# EAGLE board MPL3115A2_breakout-Panel-v11b (EAGLE 7.5.0), part 1 of 2
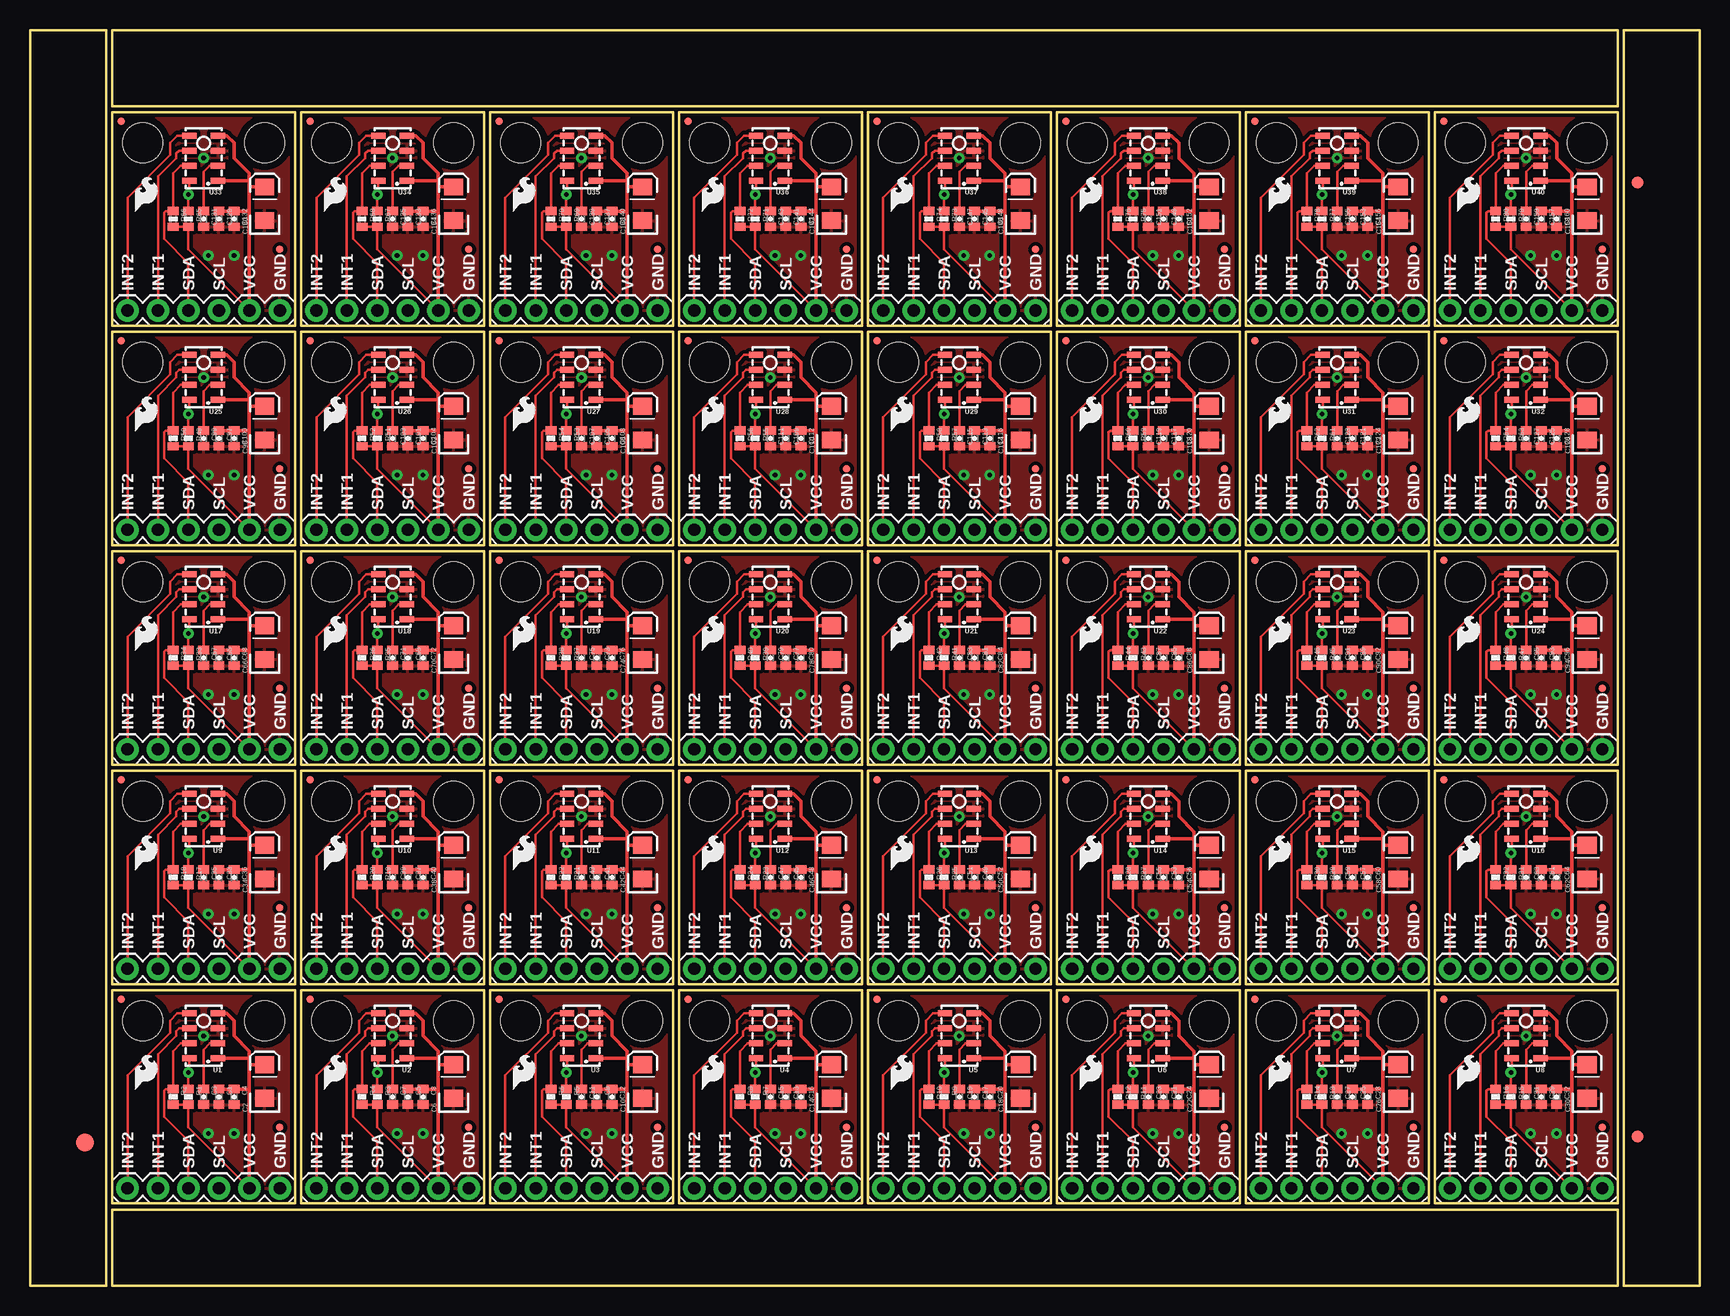
[diagram p0: board, top side]
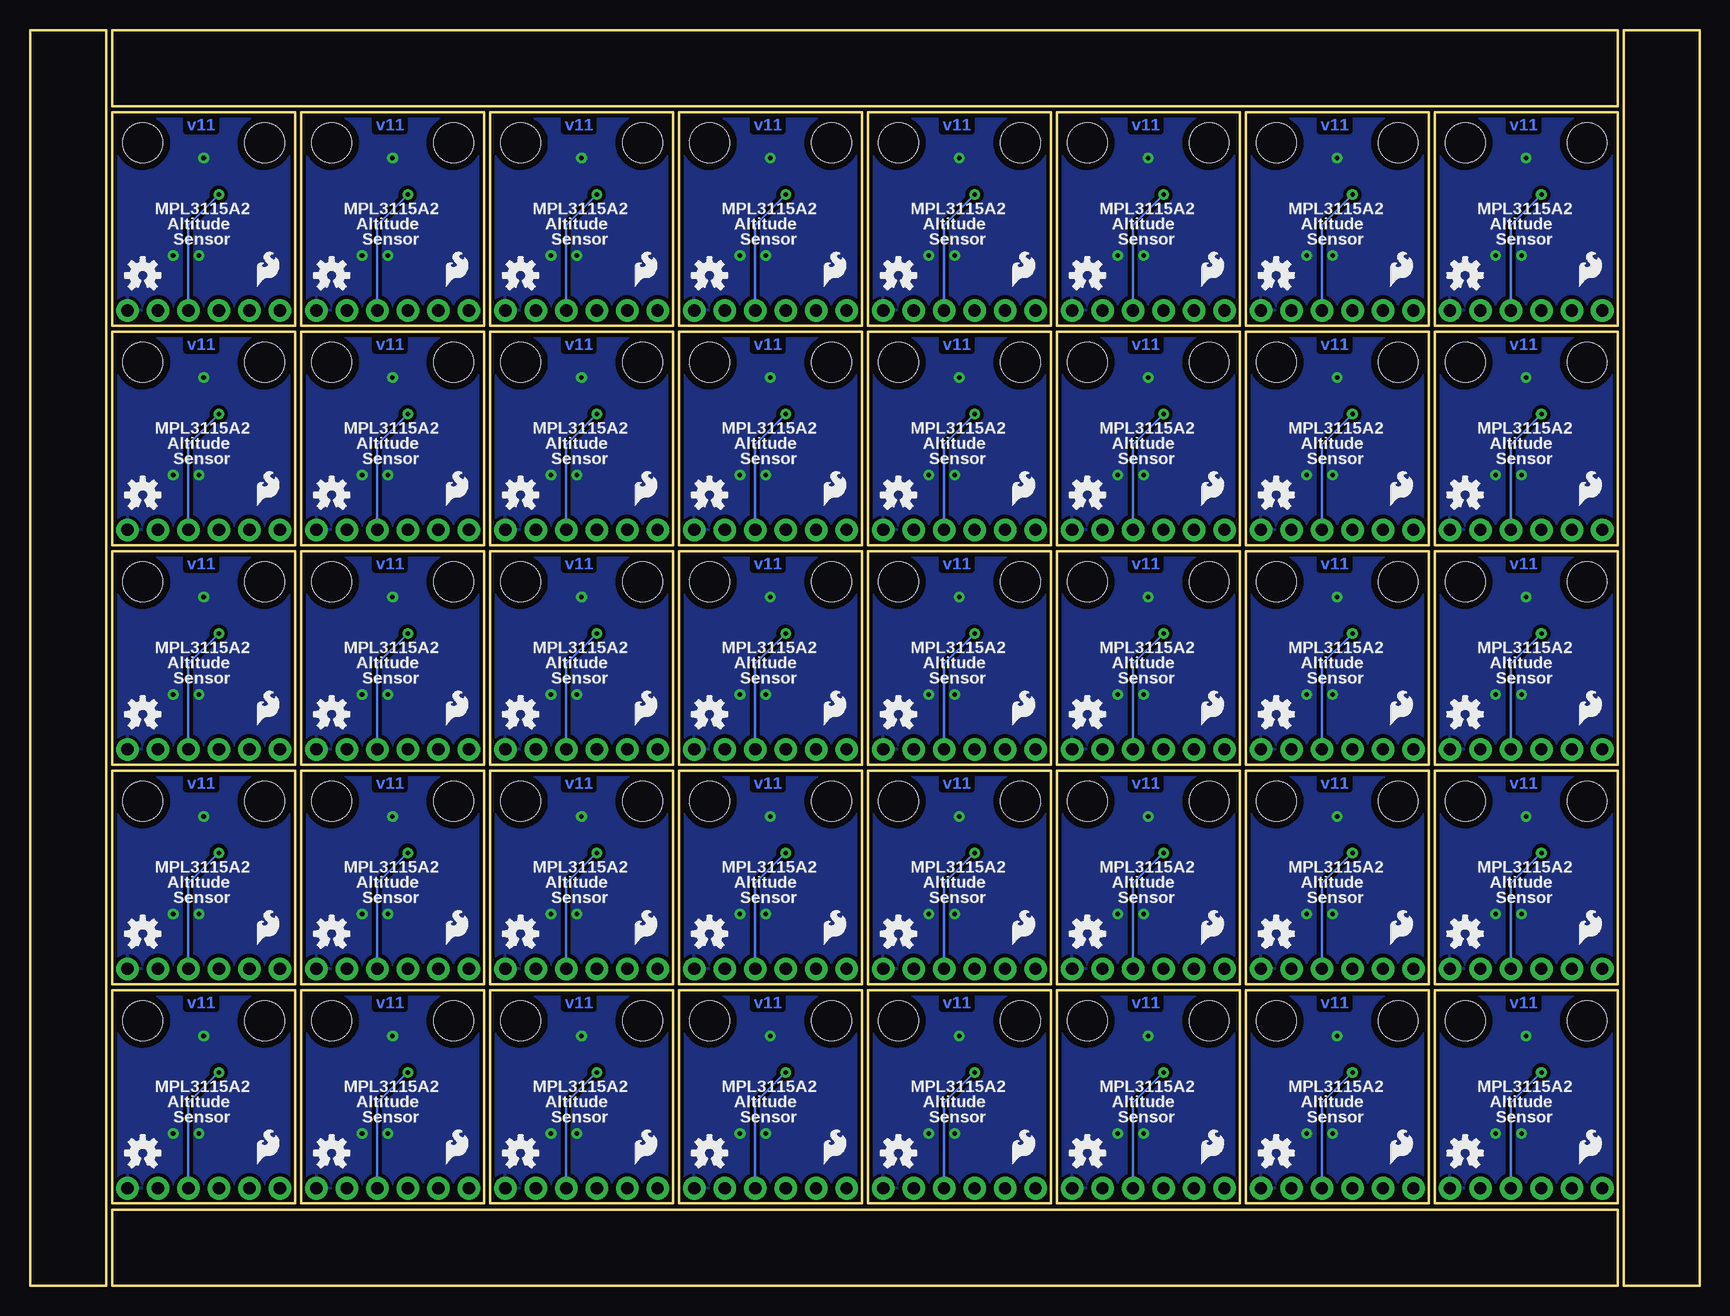
[diagram p1: board, bottom side, seen from below]

Size 139.19 x 104.65 mm. Coordinates in mm from the lower left corner, seen from the top.
Outline: 184 segments
Copper layers (1*16): Top 0.0356mm / dielectric 1.5011mm / Bottom 0.0356mm
Design rules "default": minimum track width 8mil, minimum drill 15mil, track to track 8mil, track to pad 8mil, pad to pad 8mil, via to via 8mil, smd to smd 8mil, copper to edge 10mil, drill to drill 8mil, minimum pad ring 12mil, minimum via ring 10mil, stop-mask expansion 4mil, vias tented up to drill 20mil, thermal gap 10mil

## Footprints (pad centres in the part's own frame; a part is rotated, then mirrored left to right if it is on the bottom)
0402-CAP = smd 0.7 x 0.9: 1 -0.65,0; 2 0.65,0
EIA3216 = smd 1.4 x 1.6: A 1.4,0; C -1.4,0
FIDUCIAL-1.5X3 = smd 1.5 x 1.5: 1 0,0
FIDUCIAL-1X2 = smd 1 x 1: 1 0,0
STAND-OFF = hole 3.302: 0,0
1X06 = drill 1.016 pad 1.88: 1 0,0; 2 2.54,0; 3 5.08,0; 4 7.62,0; 5 10.16,0; 6 12.7,0
MICRO-FIDUCIAL = smd 0.635 x 0.635: 1 0,0
0402-RES = smd 0.7 x 0.9: 1 -0.65,0; 2 0.65,0
LGA8 = smd 1.2 x 0.5: 1 -1.2,1.875; 2 -1.2,0.625; 3 -1.2,-0.625; 4 -1.2,-1.875; 5 1.2,-1.875; 6 1.2,-0.625; 7 1.2,0.625; 8 1.2,1.875

## Placement (x,y rotation side)
C1  0.1uF  [0402-CAP]  15.75,15.75 270 top
C2  10uF  [EIA3216]  19.56,17.02 90 top
C3  0.1uF  [0402-CAP]  14.48,15.75 270 top
C4  1uF  [0402-CAP]  17.02,15.75 270 top
C5  0.1uF  [0402-CAP]  31.5,15.75 270 top
C6  10uF  [EIA3216]  35.31,17.02 90 top
C7  0.1uF  [0402-CAP]  30.23,15.75 270 top
C8  1uF  [0402-CAP]  32.77,15.75 270 top
C9  0.1uF  [0402-CAP]  47.24,15.75 270 top
C10  10uF  [EIA3216]  51.05,17.02 90 top
C11  0.1uF  [0402-CAP]  45.97,15.75 270 top
C12  1uF  [0402-CAP]  48.51,15.75 270 top
C13  0.1uF  [0402-CAP]  62.99,15.75 270 top
C14  10uF  [EIA3216]  66.8,17.02 90 top
C15  0.1uF  [0402-CAP]  61.72,15.75 270 top
C16  1uF  [0402-CAP]  64.26,15.75 270 top
C17  0.1uF  [0402-CAP]  78.74,15.75 270 top
C18  10uF  [EIA3216]  82.55,17.02 90 top
C19  0.1uF  [0402-CAP]  77.47,15.75 270 top
C20  1uF  [0402-CAP]  80.01,15.75 270 top
C21  0.1uF  [0402-CAP]  94.49,15.75 270 top
C22  10uF  [EIA3216]  98.3,17.02 90 top
C23  0.1uF  [0402-CAP]  93.22,15.75 270 top
C24  1uF  [0402-CAP]  95.76,15.75 270 top
C25  0.1uF  [0402-CAP]  110.24,15.75 270 top
C26  10uF  [EIA3216]  114.05,17.02 90 top
C27  0.1uF  [0402-CAP]  108.97,15.75 270 top
C28  1uF  [0402-CAP]  111.51,15.75 270 top
C29  0.1uF  [0402-CAP]  125.98,15.75 270 top
C30  10uF  [EIA3216]  129.79,17.02 90 top
C31  0.1uF  [0402-CAP]  124.71,15.75 270 top
C32  1uF  [0402-CAP]  127.25,15.75 270 top
C33  0.1uF  [0402-CAP]  15.75,34.04 270 top
C34  10uF  [EIA3216]  19.56,35.31 90 top
C35  0.1uF  [0402-CAP]  14.48,34.04 270 top
C36  1uF  [0402-CAP]  17.02,34.04 270 top
C37  0.1uF  [0402-CAP]  31.5,34.04 270 top
C38  10uF  [EIA3216]  35.31,35.31 90 top
C39  0.1uF  [0402-CAP]  30.23,34.04 270 top
C40  1uF  [0402-CAP]  32.77,34.04 270 top
C41  0.1uF  [0402-CAP]  47.24,34.04 270 top
C42  10uF  [EIA3216]  51.05,35.31 90 top
C43  0.1uF  [0402-CAP]  45.97,34.04 270 top
C44  1uF  [0402-CAP]  48.51,34.04 270 top
C45  0.1uF  [0402-CAP]  62.99,34.04 270 top
C46  10uF  [EIA3216]  66.8,35.31 90 top
C47  0.1uF  [0402-CAP]  61.72,34.04 270 top
C48  1uF  [0402-CAP]  64.26,34.04 270 top
C49  0.1uF  [0402-CAP]  78.74,34.04 270 top
C50  10uF  [EIA3216]  82.55,35.31 90 top
C51  0.1uF  [0402-CAP]  77.47,34.04 270 top
C52  1uF  [0402-CAP]  80.01,34.04 270 top
C53  0.1uF  [0402-CAP]  94.49,34.04 270 top
C54  10uF  [EIA3216]  98.3,35.31 90 top
C55  0.1uF  [0402-CAP]  93.22,34.04 270 top
C56  1uF  [0402-CAP]  95.76,34.04 270 top
C57  0.1uF  [0402-CAP]  110.24,34.04 270 top
C58  10uF  [EIA3216]  114.05,35.31 90 top
C59  0.1uF  [0402-CAP]  108.97,34.04 270 top
C60  1uF  [0402-CAP]  111.51,34.04 270 top
C61  0.1uF  [0402-CAP]  125.98,34.04 270 top
C62  10uF  [EIA3216]  129.79,35.31 90 top
C63  0.1uF  [0402-CAP]  124.71,34.04 270 top
C64  1uF  [0402-CAP]  127.25,34.04 270 top
C65  0.1uF  [0402-CAP]  15.75,52.32 270 top
C66  10uF  [EIA3216]  19.56,53.59 90 top
C67  0.1uF  [0402-CAP]  14.48,52.32 270 top
C68  1uF  [0402-CAP]  17.02,52.32 270 top
C69  0.1uF  [0402-CAP]  31.5,52.32 270 top
C70  10uF  [EIA3216]  35.31,53.59 90 top
C71  0.1uF  [0402-CAP]  30.23,52.32 270 top
C72  1uF  [0402-CAP]  32.77,52.32 270 top
C73  0.1uF  [0402-CAP]  47.24,52.32 270 top
C74  10uF  [EIA3216]  51.05,53.59 90 top
C75  0.1uF  [0402-CAP]  45.97,52.32 270 top
C76  1uF  [0402-CAP]  48.51,52.32 270 top
C77  0.1uF  [0402-CAP]  62.99,52.32 270 top
C78  10uF  [EIA3216]  66.8,53.59 90 top
C79  0.1uF  [0402-CAP]  61.72,52.32 270 top
C80  1uF  [0402-CAP]  64.26,52.32 270 top
C81  0.1uF  [0402-CAP]  78.74,52.32 270 top
C82  10uF  [EIA3216]  82.55,53.59 90 top
C83  0.1uF  [0402-CAP]  77.47,52.32 270 top
C84  1uF  [0402-CAP]  80.01,52.32 270 top
C85  0.1uF  [0402-CAP]  94.49,52.32 270 top
C86  10uF  [EIA3216]  98.3,53.59 90 top
C87  0.1uF  [0402-CAP]  93.22,52.32 270 top
C88  1uF  [0402-CAP]  95.76,52.32 270 top
C89  0.1uF  [0402-CAP]  110.24,52.32 270 top
C90  10uF  [EIA3216]  114.05,53.59 90 top
C91  0.1uF  [0402-CAP]  108.97,52.32 270 top
C92  1uF  [0402-CAP]  111.51,52.32 270 top
C93  0.1uF  [0402-CAP]  125.98,52.32 270 top
C94  10uF  [EIA3216]  129.79,53.59 90 top
C95  0.1uF  [0402-CAP]  124.71,52.32 270 top
C96  1uF  [0402-CAP]  127.25,52.32 270 top
C97  0.1uF  [0402-CAP]  15.75,70.61 270 top
C98  10uF  [EIA3216]  19.56,71.88 90 top
C99  0.1uF  [0402-CAP]  14.48,70.61 270 top
C100  1uF  [0402-CAP]  17.02,70.61 270 top
C101  0.1uF  [0402-CAP]  31.5,70.61 270 top
C102  10uF  [EIA3216]  35.31,71.88 90 top
C103  0.1uF  [0402-CAP]  30.23,70.61 270 top
C104  1uF  [0402-CAP]  32.77,70.61 270 top
C105  0.1uF  [0402-CAP]  47.24,70.61 270 top
C106  10uF  [EIA3216]  51.05,71.88 90 top
C107  0.1uF  [0402-CAP]  45.97,70.61 270 top
C108  1uF  [0402-CAP]  48.51,70.61 270 top
C109  0.1uF  [0402-CAP]  62.99,70.61 270 top
C110  10uF  [EIA3216]  66.8,71.88 90 top
C111  0.1uF  [0402-CAP]  61.72,70.61 270 top
C112  1uF  [0402-CAP]  64.26,70.61 270 top
C113  0.1uF  [0402-CAP]  78.74,70.61 270 top
C114  10uF  [EIA3216]  82.55,71.88 90 top
C115  0.1uF  [0402-CAP]  77.47,70.61 270 top
C116  1uF  [0402-CAP]  80.01,70.61 270 top
C117  0.1uF  [0402-CAP]  94.49,70.61 270 top
C118  10uF  [EIA3216]  98.3,71.88 90 top
C119  0.1uF  [0402-CAP]  93.22,70.61 270 top
C120  1uF  [0402-CAP]  95.76,70.61 270 top
C121  0.1uF  [0402-CAP]  110.24,70.61 270 top
C122  10uF  [EIA3216]  114.05,71.88 90 top
C123  0.1uF  [0402-CAP]  108.97,70.61 270 top
C124  1uF  [0402-CAP]  111.51,70.61 270 top
C125  0.1uF  [0402-CAP]  125.98,70.61 270 top
C126  10uF  [EIA3216]  129.79,71.88 90 top
C127  0.1uF  [0402-CAP]  124.71,70.61 270 top
C128  1uF  [0402-CAP]  127.25,70.61 270 top
C129  0.1uF  [0402-CAP]  15.75,88.9 270 top
C130  10uF  [EIA3216]  19.56,90.17 90 top
C131  0.1uF  [0402-CAP]  14.48,88.9 270 top
C132  1uF  [0402-CAP]  17.02,88.9 270 top
C133  0.1uF  [0402-CAP]  31.5,88.9 270 top
C134  10uF  [EIA3216]  35.31,90.17 90 top
C135  0.1uF  [0402-CAP]  30.23,88.9 270 top
C136  1uF  [0402-CAP]  32.77,88.9 270 top
C137  0.1uF  [0402-CAP]  47.24,88.9 270 top
C138  10uF  [EIA3216]  51.05,90.17 90 top
C139  0.1uF  [0402-CAP]  45.97,88.9 270 top
C140  1uF  [0402-CAP]  48.51,88.9 270 top
C141  0.1uF  [0402-CAP]  62.99,88.9 270 top
C142  10uF  [EIA3216]  66.8,90.17 90 top
C143  0.1uF  [0402-CAP]  61.72,88.9 270 top
C144  1uF  [0402-CAP]  64.26,88.9 270 top
C145  0.1uF  [0402-CAP]  78.74,88.9 270 top
C146  10uF  [EIA3216]  82.55,90.17 90 top
C147  0.1uF  [0402-CAP]  77.47,88.9 270 top
C148  1uF  [0402-CAP]  80.01,88.9 270 top
C149  0.1uF  [0402-CAP]  94.49,88.9 270 top
C150  10uF  [EIA3216]  98.3,90.17 90 top
C151  0.1uF  [0402-CAP]  93.22,88.9 270 top
C152  1uF  [0402-CAP]  95.76,88.9 270 top
C153  0.1uF  [0402-CAP]  110.24,88.9 270 top
C154  10uF  [EIA3216]  114.05,90.17 90 top
C155  0.1uF  [0402-CAP]  108.97,88.9 270 top
C156  1uF  [0402-CAP]  111.51,88.9 270 top
C157  0.1uF  [0402-CAP]  125.98,88.9 270 top
C158  10uF  [EIA3216]  129.79,90.17 90 top
C159  0.1uF  [0402-CAP]  124.71,88.9 270 top
C160  1uF  [0402-CAP]  127.25,88.9 270 top
E$1  [FIDUCIAL-1.5X3]  4.57,11.94 0 top
E$5  [FIDUCIAL-1X2]  133.99,12.45 0 top
E$6  [FIDUCIAL-1X2]  133.99,91.95 180 top
JP1  LOGO-SFESK  [SFE-LOGO-FLAME]  10.03,10.16 0 bottom
JP2  STAND-OFF  [STAND-OFF]  19.56,22.1 180 top
JP3  STAND-OFF  [STAND-OFF]  9.4,22.1 180 top
JP4  [1X06]  8.13,8.13 0 top
JP5  LOGO-SFESK  [SFE-LOGO-FLAME]  8.76,16.38 0 top
JP6  FIDUCIALUFIDUCIAL  [MICRO-FIDUCIAL]  20.83,13.21 0 top
JP7  FIDUCIALUFIDUCIAL  [MICRO-FIDUCIAL]  7.62,23.88 0 top
JP8  LOGO-SFESK  [SFE-LOGO-FLAME]  25.78,10.16 0 bottom
JP9  STAND-OFF  [STAND-OFF]  35.31,22.1 180 top
JP10  STAND-OFF  [STAND-OFF]  25.15,22.1 180 top
JP11  [1X06]  23.88,8.13 0 top
JP12  LOGO-SFESK  [SFE-LOGO-FLAME]  24.51,16.38 0 top
JP13  FIDUCIALUFIDUCIAL  [MICRO-FIDUCIAL]  36.58,13.21 0 top
JP14  FIDUCIALUFIDUCIAL  [MICRO-FIDUCIAL]  23.37,23.88 0 top
JP15  LOGO-SFESK  [SFE-LOGO-FLAME]  41.53,10.16 0 bottom
JP16  STAND-OFF  [STAND-OFF]  51.05,22.1 180 top
JP17  STAND-OFF  [STAND-OFF]  40.89,22.1 180 top
JP18  [1X06]  39.62,8.13 0 top
JP19  LOGO-SFESK  [SFE-LOGO-FLAME]  40.26,16.38 0 top
JP20  FIDUCIALUFIDUCIAL  [MICRO-FIDUCIAL]  52.32,13.21 0 top
JP21  FIDUCIALUFIDUCIAL  [MICRO-FIDUCIAL]  39.12,23.88 0 top
JP22  LOGO-SFESK  [SFE-LOGO-FLAME]  57.28,10.16 0 bottom
JP23  STAND-OFF  [STAND-OFF]  66.8,22.1 180 top
JP24  STAND-OFF  [STAND-OFF]  56.64,22.1 180 top
JP25  [1X06]  55.37,8.13 0 top
JP26  LOGO-SFESK  [SFE-LOGO-FLAME]  56.01,16.38 0 top
JP27  FIDUCIALUFIDUCIAL  [MICRO-FIDUCIAL]  68.07,13.21 0 top
JP28  FIDUCIALUFIDUCIAL  [MICRO-FIDUCIAL]  54.86,23.88 0 top
JP29  LOGO-SFESK  [SFE-LOGO-FLAME]  73.03,10.16 0 bottom
JP30  STAND-OFF  [STAND-OFF]  82.55,22.1 180 top
JP31  STAND-OFF  [STAND-OFF]  72.39,22.1 180 top
JP32  [1X06]  71.12,8.13 0 top
JP33  LOGO-SFESK  [SFE-LOGO-FLAME]  71.75,16.38 0 top
JP34  FIDUCIALUFIDUCIAL  [MICRO-FIDUCIAL]  83.82,13.21 0 top
JP35  FIDUCIALUFIDUCIAL  [MICRO-FIDUCIAL]  70.61,23.88 0 top
JP36  LOGO-SFESK  [SFE-LOGO-FLAME]  88.77,10.16 0 bottom
JP37  STAND-OFF  [STAND-OFF]  98.3,22.1 180 top
JP38  STAND-OFF  [STAND-OFF]  88.14,22.1 180 top
JP39  [1X06]  86.87,8.13 0 top
JP40  LOGO-SFESK  [SFE-LOGO-FLAME]  87.5,16.38 0 top
JP41  FIDUCIALUFIDUCIAL  [MICRO-FIDUCIAL]  99.57,13.21 0 top
JP42  FIDUCIALUFIDUCIAL  [MICRO-FIDUCIAL]  86.36,23.88 0 top
JP43  LOGO-SFESK  [SFE-LOGO-FLAME]  104.52,10.16 0 bottom
JP44  STAND-OFF  [STAND-OFF]  114.05,22.1 180 top
JP45  STAND-OFF  [STAND-OFF]  103.89,22.1 180 top
JP46  [1X06]  102.62,8.13 0 top
JP47  LOGO-SFESK  [SFE-LOGO-FLAME]  103.25,16.38 0 top
JP48  FIDUCIALUFIDUCIAL  [MICRO-FIDUCIAL]  115.32,13.21 0 top
JP49  FIDUCIALUFIDUCIAL  [MICRO-FIDUCIAL]  102.11,23.88 0 top
JP50  LOGO-SFESK  [SFE-LOGO-FLAME]  120.27,10.16 0 bottom
JP51  STAND-OFF  [STAND-OFF]  129.79,22.1 180 top
JP52  STAND-OFF  [STAND-OFF]  119.63,22.1 180 top
JP53  [1X06]  118.36,8.13 0 top
JP54  LOGO-SFESK  [SFE-LOGO-FLAME]  119,16.38 0 top
JP55  FIDUCIALUFIDUCIAL  [MICRO-FIDUCIAL]  131.06,13.21 0 top
JP56  FIDUCIALUFIDUCIAL  [MICRO-FIDUCIAL]  117.86,23.88 0 top
JP57  LOGO-SFESK  [SFE-LOGO-FLAME]  10.03,28.45 0 bottom
JP58  STAND-OFF  [STAND-OFF]  19.56,40.39 180 top
JP59  STAND-OFF  [STAND-OFF]  9.4,40.39 180 top
JP60  [1X06]  8.13,26.42 0 top
JP61  LOGO-SFESK  [SFE-LOGO-FLAME]  8.76,34.67 0 top
JP62  FIDUCIALUFIDUCIAL  [MICRO-FIDUCIAL]  20.83,31.5 0 top
JP63  FIDUCIALUFIDUCIAL  [MICRO-FIDUCIAL]  7.62,42.16 0 top
JP64  LOGO-SFESK  [SFE-LOGO-FLAME]  25.78,28.45 0 bottom
JP65  STAND-OFF  [STAND-OFF]  35.31,40.39 180 top
JP66  STAND-OFF  [STAND-OFF]  25.15,40.39 180 top
JP67  [1X06]  23.88,26.42 0 top
JP68  LOGO-SFESK  [SFE-LOGO-FLAME]  24.51,34.67 0 top
JP69  FIDUCIALUFIDUCIAL  [MICRO-FIDUCIAL]  36.58,31.5 0 top
JP70  FIDUCIALUFIDUCIAL  [MICRO-FIDUCIAL]  23.37,42.16 0 top
JP71  LOGO-SFESK  [SFE-LOGO-FLAME]  41.53,28.45 0 bottom
JP72  STAND-OFF  [STAND-OFF]  51.05,40.39 180 top
JP73  STAND-OFF  [STAND-OFF]  40.89,40.39 180 top
JP74  [1X06]  39.62,26.42 0 top
JP75  LOGO-SFESK  [SFE-LOGO-FLAME]  40.26,34.67 0 top
JP76  FIDUCIALUFIDUCIAL  [MICRO-FIDUCIAL]  52.32,31.5 0 top
JP77  FIDUCIALUFIDUCIAL  [MICRO-FIDUCIAL]  39.12,42.16 0 top
JP78  LOGO-SFESK  [SFE-LOGO-FLAME]  57.28,28.45 0 bottom
JP79  STAND-OFF  [STAND-OFF]  66.8,40.39 180 top
JP80  STAND-OFF  [STAND-OFF]  56.64,40.39 180 top
JP81  [1X06]  55.37,26.42 0 top
JP82  LOGO-SFESK  [SFE-LOGO-FLAME]  56.01,34.67 0 top
JP83  FIDUCIALUFIDUCIAL  [MICRO-FIDUCIAL]  68.07,31.5 0 top
JP84  FIDUCIALUFIDUCIAL  [MICRO-FIDUCIAL]  54.86,42.16 0 top
JP85  LOGO-SFESK  [SFE-LOGO-FLAME]  73.03,28.45 0 bottom
JP86  STAND-OFF  [STAND-OFF]  82.55,40.39 180 top
JP87  STAND-OFF  [STAND-OFF]  72.39,40.39 180 top
JP88  [1X06]  71.12,26.42 0 top
JP89  LOGO-SFESK  [SFE-LOGO-FLAME]  71.75,34.67 0 top
JP90  FIDUCIALUFIDUCIAL  [MICRO-FIDUCIAL]  83.82,31.5 0 top
JP91  FIDUCIALUFIDUCIAL  [MICRO-FIDUCIAL]  70.61,42.16 0 top
JP92  LOGO-SFESK  [SFE-LOGO-FLAME]  88.77,28.45 0 bottom
JP93  STAND-OFF  [STAND-OFF]  98.3,40.39 180 top
JP94  STAND-OFF  [STAND-OFF]  88.14,40.39 180 top
JP95  [1X06]  86.87,26.42 0 top
JP96  LOGO-SFESK  [SFE-LOGO-FLAME]  87.5,34.67 0 top
JP97  FIDUCIALUFIDUCIAL  [MICRO-FIDUCIAL]  99.57,31.5 0 top
JP98  FIDUCIALUFIDUCIAL  [MICRO-FIDUCIAL]  86.36,42.16 0 top
JP99  LOGO-SFESK  [SFE-LOGO-FLAME]  104.52,28.45 0 bottom
JP100  STAND-OFF  [STAND-OFF]  114.05,40.39 180 top
JP101  STAND-OFF  [STAND-OFF]  103.89,40.39 180 top
JP102  [1X06]  102.62,26.42 0 top
JP103  LOGO-SFESK  [SFE-LOGO-FLAME]  103.25,34.67 0 top
JP104  FIDUCIALUFIDUCIAL  [MICRO-FIDUCIAL]  115.32,31.5 0 top
JP105  FIDUCIALUFIDUCIAL  [MICRO-FIDUCIAL]  102.11,42.16 0 top
JP106  LOGO-SFESK  [SFE-LOGO-FLAME]  120.27,28.45 0 bottom
JP107  STAND-OFF  [STAND-OFF]  129.79,40.39 180 top
JP108  STAND-OFF  [STAND-OFF]  119.63,40.39 180 top
JP109  [1X06]  118.36,26.42 0 top
JP110  LOGO-SFESK  [SFE-LOGO-FLAME]  119,34.67 0 top
JP111  FIDUCIALUFIDUCIAL  [MICRO-FIDUCIAL]  131.06,31.5 0 top
JP112  FIDUCIALUFIDUCIAL  [MICRO-FIDUCIAL]  117.86,42.16 0 top
JP113  LOGO-SFESK  [SFE-LOGO-FLAME]  10.03,46.74 0 bottom
JP114  STAND-OFF  [STAND-OFF]  19.56,58.67 180 top
JP115  STAND-OFF  [STAND-OFF]  9.4,58.67 180 top
JP116  [1X06]  8.13,44.7 0 top
JP117  LOGO-SFESK  [SFE-LOGO-FLAME]  8.76,52.96 0 top
JP118  FIDUCIALUFIDUCIAL  [MICRO-FIDUCIAL]  20.83,49.78 0 top
JP119  FIDUCIALUFIDUCIAL  [MICRO-FIDUCIAL]  7.62,60.45 0 top
JP120  LOGO-SFESK  [SFE-LOGO-FLAME]  25.78,46.74 0 bottom
JP121  STAND-OFF  [STAND-OFF]  35.31,58.67 180 top
JP122  STAND-OFF  [STAND-OFF]  25.15,58.67 180 top
JP123  [1X06]  23.88,44.7 0 top
JP124  LOGO-SFESK  [SFE-LOGO-FLAME]  24.51,52.96 0 top
JP125  FIDUCIALUFIDUCIAL  [MICRO-FIDUCIAL]  36.58,49.78 0 top
JP126  FIDUCIALUFIDUCIAL  [MICRO-FIDUCIAL]  23.37,60.45 0 top
JP127  LOGO-SFESK  [SFE-LOGO-FLAME]  41.53,46.74 0 bottom
JP128  STAND-OFF  [STAND-OFF]  51.05,58.67 180 top
JP129  STAND-OFF  [STAND-OFF]  40.89,58.67 180 top
JP130  [1X06]  39.62,44.7 0 top
JP131  LOGO-SFESK  [SFE-LOGO-FLAME]  40.26,52.96 0 top
JP132  FIDUCIALUFIDUCIAL  [MICRO-FIDUCIAL]  52.32,49.78 0 top
JP133  FIDUCIALUFIDUCIAL  [MICRO-FIDUCIAL]  39.12,60.45 0 top
JP134  LOGO-SFESK  [SFE-LOGO-FLAME]  57.28,46.74 0 bottom
JP135  STAND-OFF  [STAND-OFF]  66.8,58.67 180 top
JP136  STAND-OFF  [STAND-OFF]  56.64,58.67 180 top
JP137  [1X06]  55.37,44.7 0 top
JP138  LOGO-SFESK  [SFE-LOGO-FLAME]  56.01,52.96 0 top
JP139  FIDUCIALUFIDUCIAL  [MICRO-FIDUCIAL]  68.07,49.78 0 top
JP140  FIDUCIALUFIDUCIAL  [MICRO-FIDUCIAL]  54.86,60.45 0 top
JP141  LOGO-SFESK  [SFE-LOGO-FLAME]  73.03,46.74 0 bottom
JP142  STAND-OFF  [STAND-OFF]  82.55,58.67 180 top
JP143  STAND-OFF  [STAND-OFF]  72.39,58.67 180 top
JP144  [1X06]  71.12,44.7 0 top
JP145  LOGO-SFESK  [SFE-LOGO-FLAME]  71.75,52.96 0 top
JP146  FIDUCIALUFIDUCIAL  [MICRO-FIDUCIAL]  83.82,49.78 0 top
JP147  FIDUCIALUFIDUCIAL  [MICRO-FIDUCIAL]  70.61,60.45 0 top
JP148  LOGO-SFESK  [SFE-LOGO-FLAME]  88.77,46.74 0 bottom
JP149  STAND-OFF  [STAND-OFF]  98.3,58.67 180 top
JP150  STAND-OFF  [STAND-OFF]  88.14,58.67 180 top
JP151  [1X06]  86.87,44.7 0 top
JP152  LOGO-SFESK  [SFE-LOGO-FLAME]  87.5,52.96 0 top
JP153  FIDUCIALUFIDUCIAL  [MICRO-FIDUCIAL]  99.57,49.78 0 top
JP154  FIDUCIALUFIDUCIAL  [MICRO-FIDUCIAL]  86.36,60.45 0 top
JP155  LOGO-SFESK  [SFE-LOGO-FLAME]  104.52,46.74 0 bottom
JP156  STAND-OFF  [STAND-OFF]  114.05,58.67 180 top
JP157  STAND-OFF  [STAND-OFF]  103.89,58.67 180 top
JP158  [1X06]  102.62,44.7 0 top
JP159  LOGO-SFESK  [SFE-LOGO-FLAME]  103.25,52.96 0 top
JP160  FIDUCIALUFIDUCIAL  [MICRO-FIDUCIAL]  115.32,49.78 0 top
JP161  FIDUCIALUFIDUCIAL  [MICRO-FIDUCIAL]  102.11,60.45 0 top
JP162  LOGO-SFESK  [SFE-LOGO-FLAME]  120.27,46.74 0 bottom
JP163  STAND-OFF  [STAND-OFF]  129.79,58.67 180 top
JP164  STAND-OFF  [STAND-OFF]  119.63,58.67 180 top
JP165  [1X06]  118.36,44.7 0 top
JP166  LOGO-SFESK  [SFE-LOGO-FLAME]  119,52.96 0 top
JP167  FIDUCIALUFIDUCIAL  [MICRO-FIDUCIAL]  131.06,49.78 0 top
JP168  FIDUCIALUFIDUCIAL  [MICRO-FIDUCIAL]  117.86,60.45 0 top
JP169  LOGO-SFESK  [SFE-LOGO-FLAME]  10.03,65.02 0 bottom
JP170  STAND-OFF  [STAND-OFF]  19.56,76.96 180 top
JP171  STAND-OFF  [STAND-OFF]  9.4,76.96 180 top
JP172  [1X06]  8.13,62.99 0 top
JP173  LOGO-SFESK  [SFE-LOGO-FLAME]  8.76,71.25 0 top
JP174  FIDUCIALUFIDUCIAL  [MICRO-FIDUCIAL]  20.83,68.07 0 top
JP175  FIDUCIALUFIDUCIAL  [MICRO-FIDUCIAL]  7.62,78.74 0 top
JP176  LOGO-SFESK  [SFE-LOGO-FLAME]  25.78,65.02 0 bottom
JP177  STAND-OFF  [STAND-OFF]  35.31,76.96 180 top
JP178  STAND-OFF  [STAND-OFF]  25.15,76.96 180 top
JP179  [1X06]  23.88,62.99 0 top
JP180  LOGO-SFESK  [SFE-LOGO-FLAME]  24.51,71.25 0 top
JP181  FIDUCIALUFIDUCIAL  [MICRO-FIDUCIAL]  36.58,68.07 0 top
JP182  FIDUCIALUFIDUCIAL  [MICRO-FIDUCIAL]  23.37,78.74 0 top
JP183  LOGO-SFESK  [SFE-LOGO-FLAME]  41.53,65.02 0 bottom
JP184  STAND-OFF  [STAND-OFF]  51.05,76.96 180 top
JP185  STAND-OFF  [STAND-OFF]  40.89,76.96 180 top
JP186  [1X06]  39.62,62.99 0 top
JP187  LOGO-SFESK  [SFE-LOGO-FLAME]  40.26,71.25 0 top
JP188  FIDUCIALUFIDUCIAL  [MICRO-FIDUCIAL]  52.32,68.07 0 top
JP189  FIDUCIALUFIDUCIAL  [MICRO-FIDUCIAL]  39.12,78.74 0 top
JP190  LOGO-SFESK  [SFE-LOGO-FLAME]  57.28,65.02 0 bottom
JP191  STAND-OFF  [STAND-OFF]  66.8,76.96 180 top
JP192  STAND-OFF  [STAND-OFF]  56.64,76.96 180 top
JP193  [1X06]  55.37,62.99 0 top
JP194  LOGO-SFESK  [SFE-LOGO-FLAME]  56.01,71.25 0 top
JP195  FIDUCIALUFIDUCIAL  [MICRO-FIDUCIAL]  68.07,68.07 0 top
JP196  FIDUCIALUFIDUCIAL  [MICRO-FIDUCIAL]  54.86,78.74 0 top
JP197  LOGO-SFESK  [SFE-LOGO-FLAME]  73.03,65.02 0 bottom
JP198  STAND-OFF  [STAND-OFF]  82.55,76.96 180 top
JP199  STAND-OFF  [STAND-OFF]  72.39,76.96 180 top
JP200  [1X06]  71.12,62.99 0 top
JP201  LOGO-SFESK  [SFE-LOGO-FLAME]  71.75,71.25 0 top
JP202  FIDUCIALUFIDUCIAL  [MICRO-FIDUCIAL]  83.82,68.07 0 top
JP203  FIDUCIALUFIDUCIAL  [MICRO-FIDUCIAL]  70.61,78.74 0 top
JP204  LOGO-SFESK  [SFE-LOGO-FLAME]  88.77,65.02 0 bottom
JP205  STAND-OFF  [STAND-OFF]  98.3,76.96 180 top
JP206  STAND-OFF  [STAND-OFF]  88.14,76.96 180 top
JP207  [1X06]  86.87,62.99 0 top
JP208  LOGO-SFESK  [SFE-LOGO-FLAME]  87.5,71.25 0 top
JP209  FIDUCIALUFIDUCIAL  [MICRO-FIDUCIAL]  99.57,68.07 0 top
JP210  FIDUCIALUFIDUCIAL  [MICRO-FIDUCIAL]  86.36,78.74 0 top
JP211  LOGO-SFESK  [SFE-LOGO-FLAME]  104.52,65.02 0 bottom
JP212  STAND-OFF  [STAND-OFF]  114.05,76.96 180 top
JP213  STAND-OFF  [STAND-OFF]  103.89,76.96 180 top
JP214  [1X06]  102.62,62.99 0 top
JP215  LOGO-SFESK  [SFE-LOGO-FLAME]  103.25,71.25 0 top
JP216  FIDUCIALUFIDUCIAL  [MICRO-FIDUCIAL]  115.32,68.07 0 top
JP217  FIDUCIALUFIDUCIAL  [MICRO-FIDUCIAL]  102.11,78.74 0 top
JP218  LOGO-SFESK  [SFE-LOGO-FLAME]  120.27,65.02 0 bottom
JP219  STAND-OFF  [STAND-OFF]  129.79,76.96 180 top
JP220  STAND-OFF  [STAND-OFF]  119.63,76.96 180 top
JP221  [1X06]  118.36,62.99 0 top
JP222  LOGO-SFESK  [SFE-LOGO-FLAME]  119,71.25 0 top
JP223  FIDUCIALUFIDUCIAL  [MICRO-FIDUCIAL]  131.06,68.07 0 top
JP224  FIDUCIALUFIDUCIAL  [MICRO-FIDUCIAL]  117.86,78.74 0 top
JP225  LOGO-SFESK  [SFE-LOGO-FLAME]  10.03,83.31 0 bottom
JP226  STAND-OFF  [STAND-OFF]  19.56,95.25 180 top
JP227  STAND-OFF  [STAND-OFF]  9.4,95.25 180 top
JP228  [1X06]  8.13,81.28 0 top
JP229  LOGO-SFESK  [SFE-LOGO-FLAME]  8.76,89.53 0 top
JP230  FIDUCIALUFIDUCIAL  [MICRO-FIDUCIAL]  20.83,86.36 0 top
JP231  FIDUCIALUFIDUCIAL  [MICRO-FIDUCIAL]  7.62,97.03 0 top
JP232  LOGO-SFESK  [SFE-LOGO-FLAME]  25.78,83.31 0 bottom
JP233  STAND-OFF  [STAND-OFF]  35.31,95.25 180 top
JP234  STAND-OFF  [STAND-OFF]  25.15,95.25 180 top
JP235  [1X06]  23.88,81.28 0 top
JP236  LOGO-SFESK  [SFE-LOGO-FLAME]  24.51,89.53 0 top
JP237  FIDUCIALUFIDUCIAL  [MICRO-FIDUCIAL]  36.58,86.36 0 top
JP238  FIDUCIALUFIDUCIAL  [MICRO-FIDUCIAL]  23.37,97.03 0 top
JP239  LOGO-SFESK  [SFE-LOGO-FLAME]  41.53,83.31 0 bottom
JP240  STAND-OFF  [STAND-OFF]  51.05,95.25 180 top
JP241  STAND-OFF  [STAND-OFF]  40.89,95.25 180 top
JP242  [1X06]  39.62,81.28 0 top
JP243  LOGO-SFESK  [SFE-LOGO-FLAME]  40.26,89.53 0 top
JP244  FIDUCIALUFIDUCIAL  [MICRO-FIDUCIAL]  52.32,86.36 0 top
JP245  FIDUCIALUFIDUCIAL  [MICRO-FIDUCIAL]  39.12,97.03 0 top
JP246  LOGO-SFESK  [SFE-LOGO-FLAME]  57.28,83.31 0 bottom
JP247  STAND-OFF  [STAND-OFF]  66.8,95.25 180 top
JP248  STAND-OFF  [STAND-OFF]  56.64,95.25 180 top
JP249  [1X06]  55.37,81.28 0 top
JP250  LOGO-SFESK  [SFE-LOGO-FLAME]  56.01,89.53 0 top
JP251  FIDUCIALUFIDUCIAL  [MICRO-FIDUCIAL]  68.07,86.36 0 top
JP252  FIDUCIALUFIDUCIAL  [MICRO-FIDUCIAL]  54.86,97.03 0 top
JP253  LOGO-SFESK  [SFE-LOGO-FLAME]  73.03,83.31 0 bottom
JP254  STAND-OFF  [STAND-OFF]  82.55,95.25 180 top
JP255  STAND-OFF  [STAND-OFF]  72.39,95.25 180 top
JP256  [1X06]  71.12,81.28 0 top
JP257  LOGO-SFESK  [SFE-LOGO-FLAME]  71.75,89.53 0 top
JP258  FIDUCIALUFIDUCIAL  [MICRO-FIDUCIAL]  83.82,86.36 0 top
JP259  FIDUCIALUFIDUCIAL  [MICRO-FIDUCIAL]  70.61,97.03 0 top
JP260  LOGO-SFESK  [SFE-LOGO-FLAME]  88.77,83.31 0 bottom
JP261  STAND-OFF  [STAND-OFF]  98.3,95.25 180 top
JP262  STAND-OFF  [STAND-OFF]  88.14,95.25 180 top
JP263  [1X06]  86.87,81.28 0 top
JP264  LOGO-SFESK  [SFE-LOGO-FLAME]  87.5,89.53 0 top
JP265  FIDUCIALUFIDUCIAL  [MICRO-FIDUCIAL]  99.57,86.36 0 top
JP266  FIDUCIALUFIDUCIAL  [MICRO-FIDUCIAL]  86.36,97.03 0 top
JP267  LOGO-SFESK  [SFE-LOGO-FLAME]  104.52,83.31 0 bottom
JP268  STAND-OFF  [STAND-OFF]  114.05,95.25 180 top
JP269  STAND-OFF  [STAND-OFF]  103.89,95.25 180 top
JP270  [1X06]  102.62,81.28 0 top
JP271  LOGO-SFESK  [SFE-LOGO-FLAME]  103.25,89.53 0 top
JP272  FIDUCIALUFIDUCIAL  [MICRO-FIDUCIAL]  115.32,86.36 0 top
JP273  FIDUCIALUFIDUCIAL  [MICRO-FIDUCIAL]  102.11,97.03 0 top
JP274  LOGO-SFESK  [SFE-LOGO-FLAME]  120.27,83.31 0 bottom
JP275  STAND-OFF  [STAND-OFF]  129.79,95.25 180 top
JP276  STAND-OFF  [STAND-OFF]  119.63,95.25 180 top
JP277  [1X06]  118.36,81.28 0 top
JP278  LOGO-SFESK  [SFE-LOGO-FLAME]  119,89.53 0 top
JP279  FIDUCIALUFIDUCIAL  [MICRO-FIDUCIAL]  131.06,86.36 0 top
JP280  FIDUCIALUFIDUCIAL  [MICRO-FIDUCIAL]  117.86,97.03 0 top
R1  1k  [0402-RES]  13.21,15.75 270 top
R2  1k  [0402-RES]  11.94,15.75 270 top
R3  1k  [0402-RES]  28.96,15.75 270 top
R4  1k  [0402-RES]  27.69,15.75 270 top
R5  1k  [0402-RES]  44.7,15.75 270 top
R6  1k  [0402-RES]  43.43,15.75 270 top
R7  1k  [0402-RES]  60.45,15.75 270 top
R8  1k  [0402-RES]  59.18,15.75 270 top
R9  1k  [0402-RES]  76.2,15.75 270 top
R10  1k  [0402-RES]  74.93,15.75 270 top
R11  1k  [0402-RES]  91.95,15.75 270 top
R12  1k  [0402-RES]  90.68,15.75 270 top
R13  1k  [0402-RES]  107.7,15.75 270 top
R14  1k  [0402-RES]  106.43,15.75 270 top
R15  1k  [0402-RES]  123.44,15.75 270 top
R16  1k  [0402-RES]  122.17,15.75 270 top
R17  1k  [0402-RES]  13.21,34.04 270 top
R18  1k  [0402-RES]  11.94,34.04 270 top
R19  1k  [0402-RES]  28.96,34.04 270 top
R20  1k  [0402-RES]  27.69,34.04 270 top
R21  1k  [0402-RES]  44.7,34.04 270 top
R22  1k  [0402-RES]  43.43,34.04 270 top
R23  1k  [0402-RES]  60.45,34.04 270 top
R24  1k  [0402-RES]  59.18,34.04 270 top
R25  1k  [0402-RES]  76.2,34.04 270 top
R26  1k  [0402-RES]  74.93,34.04 270 top
R27  1k  [0402-RES]  91.95,34.04 270 top
R28  1k  [0402-RES]  90.68,34.04 270 top
R29  1k  [0402-RES]  107.7,34.04 270 top
R30  1k  [0402-RES]  106.43,34.04 270 top
R31  1k  [0402-RES]  123.44,34.04 270 top
R32  1k  [0402-RES]  122.17,34.04 270 top
R33  1k  [0402-RES]  13.21,52.32 270 top
R34  1k  [0402-RES]  11.94,52.32 270 top
R35  1k  [0402-RES]  28.96,52.32 270 top
R36  1k  [0402-RES]  27.69,52.32 270 top
R37  1k  [0402-RES]  44.7,52.32 270 top
R38  1k  [0402-RES]  43.43,52.32 270 top
R39  1k  [0402-RES]  60.45,52.32 270 top
R40  1k  [0402-RES]  59.18,52.32 270 top
R41  1k  [0402-RES]  76.2,52.32 270 top
R42  1k  [0402-RES]  74.93,52.32 270 top
R43  1k  [0402-RES]  91.95,52.32 270 top
R44  1k  [0402-RES]  90.68,52.32 270 top
R45  1k  [0402-RES]  107.7,52.32 270 top
R46  1k  [0402-RES]  106.43,52.32 270 top
R47  1k  [0402-RES]  123.44,52.32 270 top
R48  1k  [0402-RES]  122.17,52.32 270 top
R49  1k  [0402-RES]  13.21,70.61 270 top
R50  1k  [0402-RES]  11.94,70.61 270 top
R51  1k  [0402-RES]  28.96,70.61 270 top
R52  1k  [0402-RES]  27.69,70.61 270 top
R53  1k  [0402-RES]  44.7,70.61 270 top
R54  1k  [0402-RES]  43.43,70.61 270 top
R55  1k  [0402-RES]  60.45,70.61 270 top
R56  1k  [0402-RES]  59.18,70.61 270 top
R57  1k  [0402-RES]  76.2,70.61 270 top
R58  1k  [0402-RES]  74.93,70.61 270 top
R59  1k  [0402-RES]  91.95,70.61 270 top
R60  1k  [0402-RES]  90.68,70.61 270 top
R61  1k  [0402-RES]  107.7,70.61 270 top
R62  1k  [0402-RES]  106.43,70.61 270 top
R63  1k  [0402-RES]  123.44,70.61 270 top
R64  1k  [0402-RES]  122.17,70.61 270 top
R65  1k  [0402-RES]  13.21,88.9 270 top
R66  1k  [0402-RES]  11.94,88.9 270 top
R67  1k  [0402-RES]  28.96,88.9 270 top
R68  1k  [0402-RES]  27.69,88.9 270 top
R69  1k  [0402-RES]  44.7,88.9 270 top
R70  1k  [0402-RES]  43.43,88.9 270 top
R71  1k  [0402-RES]  60.45,88.9 270 top
R72  1k  [0402-RES]  59.18,88.9 270 top
R73  1k  [0402-RES]  76.2,88.9 270 top
R74  1k  [0402-RES]  74.93,88.9 270 top
R75  1k  [0402-RES]  91.95,88.9 270 top
R76  1k  [0402-RES]  90.68,88.9 270 top
R77  1k  [0402-RES]  107.7,88.9 270 top
R78  1k  [0402-RES]  106.43,88.9 270 top
R79  1k  [0402-RES]  123.44,88.9 270 top
R80  1k  [0402-RES]  122.17,88.9 270 top
U1  MPL3115A2LGA8  [LGA8]  14.48,20.83 180 top
U2  MPL3115A2LGA8  [LGA8]  30.23,20.83 180 top
U3  MPL3115A2LGA8  [LGA8]  45.97,20.83 180 top
U4  MPL3115A2LGA8  [LGA8]  61.72,20.83 180 top
U5  MPL3115A2LGA8  [LGA8]  77.47,20.83 180 top
U6  MPL3115A2LGA8  [LGA8]  93.22,20.83 180 top
U7  MPL3115A2LGA8  [LGA8]  108.97,20.83 180 top
U8  MPL3115A2LGA8  [LGA8]  124.71,20.83 180 top
U9  MPL3115A2LGA8  [LGA8]  14.48,39.12 180 top
U10  MPL3115A2LGA8  [LGA8]  30.23,39.12 180 top
U11  MPL3115A2LGA8  [LGA8]  45.97,39.12 180 top
U12  MPL3115A2LGA8  [LGA8]  61.72,39.12 180 top
U13  MPL3115A2LGA8  [LGA8]  77.47,39.12 180 top
U14  MPL3115A2LGA8  [LGA8]  93.22,39.12 180 top
U15  MPL3115A2LGA8  [LGA8]  108.97,39.12 180 top
U16  MPL3115A2LGA8  [LGA8]  124.71,39.12 180 top
U17  MPL3115A2LGA8  [LGA8]  14.48,57.4 180 top
U18  MPL3115A2LGA8  [LGA8]  30.23,57.4 180 top
U19  MPL3115A2LGA8  [LGA8]  45.97,57.4 180 top
U20  MPL3115A2LGA8  [LGA8]  61.72,57.4 180 top
U21  MPL3115A2LGA8  [LGA8]  77.47,57.4 180 top
U22  MPL3115A2LGA8  [LGA8]  93.22,57.4 180 top
U23  MPL3115A2LGA8  [LGA8]  108.97,57.4 180 top
U24  MPL3115A2LGA8  [LGA8]  124.71,57.4 180 top
U25  MPL3115A2LGA8  [LGA8]  14.48,75.69 180 top
U26  MPL3115A2LGA8  [LGA8]  30.23,75.69 180 top
U27  MPL3115A2LGA8  [LGA8]  45.97,75.69 180 top
U28  MPL3115A2LGA8  [LGA8]  61.72,75.69 180 top
U29  MPL3115A2LGA8  [LGA8]  77.47,75.69 180 top
U30  MPL3115A2LGA8  [LGA8]  93.22,75.69 180 top
U31  MPL3115A2LGA8  [LGA8]  108.97,75.69 180 top
U32  MPL3115A2LGA8  [LGA8]  124.71,75.69 180 top
U33  MPL3115A2LGA8  [LGA8]  14.48,93.98 180 top
U34  MPL3115A2LGA8  [LGA8]  30.23,93.98 180 top
U35  MPL3115A2LGA8  [LGA8]  45.97,93.98 180 top
U36  MPL3115A2LGA8  [LGA8]  61.72,93.98 180 top
U37  MPL3115A2LGA8  [LGA8]  77.47,93.98 180 top
U38  MPL3115A2LGA8  [LGA8]  93.22,93.98 180 top
U39  MPL3115A2LGA8  [LGA8]  108.97,93.98 180 top
U40  MPL3115A2LGA8  [LGA8]  124.71,93.98 180 top
U$1  OSHW-LOGOS  [OSHW-LOGO-S]  19.56,11.05 0 bottom
U$2  OSHW-LOGOS  [OSHW-LOGO-S]  35.31,11.05 0 bottom
U$3  OSHW-LOGOS  [OSHW-LOGO-S]  51.05,11.05 0 bottom
U$4  OSHW-LOGOS  [OSHW-LOGO-S]  66.8,11.05 0 bottom
U$5  OSHW-LOGOS  [OSHW-LOGO-S]  82.55,11.05 0 bottom
U$6  OSHW-LOGOS  [OSHW-LOGO-S]  98.3,11.05 0 bottom
U$7  OSHW-LOGOS  [OSHW-LOGO-S]  114.05,11.05 0 bottom
U$8  OSHW-LOGOS  [OSHW-LOGO-S]  129.79,11.05 0 bottom
U$9  OSHW-LOGOS  [OSHW-LOGO-S]  19.56,29.34 0 bottom
U$10  OSHW-LOGOS  [OSHW-LOGO-S]  35.31,29.34 0 bottom
U$11  OSHW-LOGOS  [OSHW-LOGO-S]  51.05,29.34 0 bottom
U$12  OSHW-LOGOS  [OSHW-LOGO-S]  66.8,29.34 0 bottom
U$13  OSHW-LOGOS  [OSHW-LOGO-S]  82.55,29.34 0 bottom
U$14  OSHW-LOGOS  [OSHW-LOGO-S]  98.3,29.34 0 bottom
U$15  OSHW-LOGOS  [OSHW-LOGO-S]  114.05,29.34 0 bottom
U$16  OSHW-LOGOS  [OSHW-LOGO-S]  129.79,29.34 0 bottom
U$17  OSHW-LOGOS  [OSHW-LOGO-S]  19.56,47.62 0 bottom
U$18  OSHW-LOGOS  [OSHW-LOGO-S]  35.31,47.62 0 bottom
U$19  OSHW-LOGOS  [OSHW-LOGO-S]  51.05,47.62 0 bottom
U$20  OSHW-LOGOS  [OSHW-LOGO-S]  66.8,47.62 0 bottom
U$21  OSHW-LOGOS  [OSHW-LOGO-S]  82.55,47.62 0 bottom
U$22  OSHW-LOGOS  [OSHW-LOGO-S]  98.3,47.62 0 bottom
U$23  OSHW-LOGOS  [OSHW-LOGO-S]  114.05,47.62 0 bottom
U$24  OSHW-LOGOS  [OSHW-LOGO-S]  129.79,47.62 0 bottom
U$25  OSHW-LOGOS  [OSHW-LOGO-S]  19.56,65.91 0 bottom
U$26  OSHW-LOGOS  [OSHW-LOGO-S]  35.31,65.91 0 bottom
U$27  OSHW-LOGOS  [OSHW-LOGO-S]  51.05,65.91 0 bottom
U$28  OSHW-LOGOS  [OSHW-LOGO-S]  66.8,65.91 0 bottom
U$29  OSHW-LOGOS  [OSHW-LOGO-S]  82.55,65.91 0 bottom
U$30  OSHW-LOGOS  [OSHW-LOGO-S]  98.3,65.91 0 bottom
U$31  OSHW-LOGOS  [OSHW-LOGO-S]  114.05,65.91 0 bottom
U$32  OSHW-LOGOS  [OSHW-LOGO-S]  129.79,65.91 0 bottom
U$33  OSHW-LOGOS  [OSHW-LOGO-S]  19.56,84.2 0 bottom
U$34  OSHW-LOGOS  [OSHW-LOGO-S]  35.31,84.2 0 bottom
U$35  OSHW-LOGOS  [OSHW-LOGO-S]  51.05,84.2 0 bottom
U$36  OSHW-LOGOS  [OSHW-LOGO-S]  66.8,84.2 0 bottom
U$37  OSHW-LOGOS  [OSHW-LOGO-S]  82.55,84.2 0 bottom
U$38  OSHW-LOGOS  [OSHW-LOGO-S]  98.3,84.2 0 bottom
U$39  OSHW-LOGOS  [OSHW-LOGO-S]  114.05,84.2 0 bottom
U$40  OSHW-LOGOS  [OSHW-LOGO-S]  129.79,84.2 0 bottom

## Library data of the parts
C1-C160 JP1-JP280 R1-R80 U$1-U$40 = SparkFun
E$1 = SparkFun-Retired
E$5 E$6 = SparkFun-Aesthetics
U1-U40 = SparkFun-Sensors

## Nets
GND: C1.2 C2.C C3.2 C4.2 JP4.6 U1.3
GND1: C5.2 C6.C C7.2 C8.2 JP11.6 U2.3
GND2: C9.2 C10.C C11.2 C12.2 JP18.6 U3.3
GND3: C13.2 C14.C C15.2 C16.2 JP25.6 U4.3
GND4: C17.2 C18.C C19.2 C20.2 JP32.6 U5.3
GND5: C21.2 C22.C C23.2 C24.2 JP39.6 U6.3
GND6: C25.2 C26.C C27.2 C28.2 JP46.6 U7.3
GND7: C29.2 C30.C C31.2 C32.2 JP53.6 U8.3
GND8: C33.2 C34.C C35.2 C36.2 JP60.6 U9.3
GND9: C37.2 C38.C C39.2 C40.2 JP67.6 U10.3
GND10: C41.2 C42.C C43.2 C44.2 JP74.6 U11.3
GND11: C45.2 C46.C C47.2 C48.2 JP81.6 U12.3
GND12: C49.2 C50.C C51.2 C52.2 JP88.6 U13.3
GND13: C53.2 C54.C C55.2 C56.2 JP95.6 U14.3
GND14: C57.2 C58.C C59.2 C60.2 JP102.6 U15.3
GND15: C61.2 C62.C C63.2 C64.2 JP109.6 U16.3
GND16: C65.2 C66.C C67.2 C68.2 JP116.6 U17.3
GND17: C69.2 C70.C C71.2 C72.2 JP123.6 U18.3
GND18: C73.2 C74.C C75.2 C76.2 JP130.6 U19.3
GND19: C77.2 C78.C C79.2 C80.2 JP137.6 U20.3
GND20: C81.2 C82.C C83.2 C84.2 JP144.6 U21.3
GND21: C85.2 C86.C C87.2 C88.2 JP151.6 U22.3
GND22: C89.2 C90.C C91.2 C92.2 JP158.6 U23.3
GND23: C93.2 C94.C C95.2 C96.2 JP165.6 U24.3
GND24: C97.2 C98.C C99.2 C100.2 JP172.6 U25.3
GND25: C101.2 C102.C C103.2 C104.2 JP179.6 U26.3
GND26: C105.2 C106.C C107.2 C108.2 JP186.6 U27.3
GND27: C109.2 C110.C C111.2 C112.2 JP193.6 U28.3
GND28: C113.2 C114.C C115.2 C116.2 JP200.6 U29.3
GND29: C117.2 C118.C C119.2 C120.2 JP207.6 U30.3
GND30: C121.2 C122.C C123.2 C124.2 JP214.6 U31.3
GND31: C125.2 C126.C C127.2 C128.2 JP221.6 U32.3
GND32: C129.2 C130.C C131.2 C132.2 JP228.6 U33.3
GND33: C133.2 C134.C C135.2 C136.2 JP235.6 U34.3
GND34: C137.2 C138.C C139.2 C140.2 JP242.6 U35.3
GND35: C141.2 C142.C C143.2 C144.2 JP249.6 U36.3
GND36: C145.2 C146.C C147.2 C148.2 JP256.6 U37.3
GND37: C149.2 C150.C C151.2 C152.2 JP263.6 U38.3
GND38: C153.2 C154.C C155.2 C156.2 JP270.6 U39.3
GND39: C157.2 C158.C C159.2 C160.2 JP277.6 U40.3
INT1: JP4.2 U1.6
INT2: JP4.1 U1.5
INT3: JP11.2 U2.6
INT4: JP11.1 U2.5
INT5: JP18.2 U3.6
INT6: JP18.1 U3.5
INT7: JP25.2 U4.6
INT8: JP25.1 U4.5
INT9: JP32.2 U5.6
INT10: JP32.1 U5.5
INT11: JP39.2 U6.6
INT12: JP39.1 U6.5
INT13: JP46.2 U7.6
INT14: JP46.1 U7.5
INT15: JP53.2 U8.6
INT16: JP53.1 U8.5
INT17: JP60.2 U9.6
INT18: JP60.1 U9.5
INT19: JP67.2 U10.6
INT20: JP67.1 U10.5
INT21: JP74.2 U11.6
INT22: JP74.1 U11.5
INT23: JP81.2 U12.6
INT24: JP81.1 U12.5
INT25: JP88.2 U13.6
INT26: JP88.1 U13.5
INT27: JP95.2 U14.6
INT28: JP95.1 U14.5
INT29: JP102.2 U15.6
INT30: JP102.1 U15.5
INT31: JP109.2 U16.6
INT32: JP109.1 U16.5
INT33: JP116.2 U17.6
INT34: JP116.1 U17.5
INT35: JP123.2 U18.6
INT36: JP123.1 U18.5
INT37: JP130.2 U19.6
INT38: JP130.1 U19.5
INT39: JP137.2 U20.6
INT40: JP137.1 U20.5
INT41: JP144.2 U21.6
INT42: JP144.1 U21.5
INT43: JP151.2 U22.6
INT44: JP151.1 U22.5
INT45: JP158.2 U23.6
INT46: JP158.1 U23.5
INT47: JP165.2 U24.6
INT48: JP165.1 U24.5
INT49: JP172.2 U25.6
INT50: JP172.1 U25.5
INT51: JP179.2 U26.6
INT52: JP179.1 U26.5
INT53: JP186.2 U27.6
INT54: JP186.1 U27.5
INT55: JP193.2 U28.6
INT56: JP193.1 U28.5
INT57: JP200.2 U29.6
INT58: JP200.1 U29.5
INT59: JP207.2 U30.6
INT60: JP207.1 U30.5
INT61: JP214.2 U31.6
INT62: JP214.1 U31.5
INT63: JP221.2 U32.6
INT64: JP221.1 U32.5
INT65: JP228.2 U33.6
INT66: JP228.1 U33.5
INT67: JP235.2 U34.6
INT68: JP235.1 U34.5
INT69: JP242.2 U35.6
INT70: JP242.1 U35.5
INT71: JP249.2 U36.6
INT72: JP249.1 U36.5
INT73: JP256.2 U37.6
INT74: JP256.1 U37.5
INT75: JP263.2 U38.6
INT76: JP263.1 U38.5
INT77: JP270.2 U39.6
INT78: JP270.1 U39.5
INT79: JP277.2 U40.6
INT80: JP277.1 U40.5
N$1: C7.1 U2.2
N$2: C11.1 U3.2
N$3: C3.1 U1.2
N$4: C15.1 U4.2
N$5: C19.1 U5.2
N$6: C23.1 U6.2
N$7: C27.1 U7.2
N$8: C31.1 U8.2
N$9: C35.1 U9.2
N$10: C39.1 U10.2
N$11: C43.1 U11.2
N$12: C47.1 U12.2
N$13: C51.1 U13.2
N$14: C55.1 U14.2
N$15: C59.1 U15.2
N$16: C63.1 U16.2
N$17: C67.1 U17.2
N$18: C71.1 U18.2
N$19: C75.1 U19.2
N$20: C79.1 U20.2
N$21: C83.1 U21.2
N$22: C87.1 U22.2
N$23: C91.1 U23.2
N$24: C95.1 U24.2
N$25: C99.1 U25.2
N$26: C103.1 U26.2
N$27: C107.1 U27.2
N$28: C111.1 U28.2
N$29: C115.1 U29.2
N$30: C119.1 U30.2
N$31: C123.1 U31.2
N$32: C127.1 U32.2
N$33: C131.1 U33.2
N$34: C135.1 U34.2
N$35: C139.1 U35.2
N$36: C143.1 U36.2
N$37: C147.1 U37.2
N$38: C151.1 U38.2
N$39: C155.1 U39.2
N$40: C159.1 U40.2
SCL: JP4.4 R1.1 U1.8
SCL1: JP11.4 R3.1 U2.8
SCL2: JP18.4 R5.1 U3.8
SCL3: JP25.4 R7.1 U4.8
SCL4: JP32.4 R9.1 U5.8
SCL5: JP39.4 R11.1 U6.8
SCL6: JP46.4 R13.1 U7.8
SCL7: JP53.4 R15.1 U8.8
SCL8: JP60.4 R17.1 U9.8
SCL9: JP67.4 R19.1 U10.8
SCL10: JP74.4 R21.1 U11.8
SCL11: JP81.4 R23.1 U12.8
SCL12: JP88.4 R25.1 U13.8
SCL13: JP95.4 R27.1 U14.8
SCL14: JP102.4 R29.1 U15.8
SCL15: JP109.4 R31.1 U16.8
SCL16: JP116.4 R33.1 U17.8
SCL17: JP123.4 R35.1 U18.8
SCL18: JP130.4 R37.1 U19.8
SCL19: JP137.4 R39.1 U20.8
SCL20: JP144.4 R41.1 U21.8
SCL21: JP151.4 R43.1 U22.8
SCL22: JP158.4 R45.1 U23.8
SCL23: JP165.4 R47.1 U24.8
SCL24: JP172.4 R49.1 U25.8
SCL25: JP179.4 R51.1 U26.8
SCL26: JP186.4 R53.1 U27.8
SCL27: JP193.4 R55.1 U28.8
SCL28: JP200.4 R57.1 U29.8
SCL29: JP207.4 R59.1 U30.8
SCL30: JP214.4 R61.1 U31.8
SCL31: JP221.4 R63.1 U32.8
SCL32: JP228.4 R65.1 U33.8
SCL33: JP235.4 R67.1 U34.8
SCL34: JP242.4 R69.1 U35.8
SCL35: JP249.4 R71.1 U36.8
SCL36: JP256.4 R73.1 U37.8
SCL37: JP263.4 R75.1 U38.8
SCL38: JP270.4 R77.1 U39.8
SCL39: JP277.4 R79.1 U40.8
SDA: JP4.3 R2.1 U1.7
SDA1: JP11.3 R4.1 U2.7
SDA2: JP18.3 R6.1 U3.7
SDA3: JP25.3 R8.1 U4.7
SDA4: JP32.3 R10.1 U5.7
SDA5: JP39.3 R12.1 U6.7
SDA6: JP46.3 R14.1 U7.7
SDA7: JP53.3 R16.1 U8.7
SDA8: JP60.3 R18.1 U9.7
SDA9: JP67.3 R20.1 U10.7
SDA10: JP74.3 R22.1 U11.7
SDA11: JP81.3 R24.1 U12.7
SDA12: JP88.3 R26.1 U13.7
SDA13: JP95.3 R28.1 U14.7
SDA14: JP102.3 R30.1 U15.7
SDA15: JP109.3 R32.1 U16.7
SDA16: JP116.3 R34.1 U17.7
SDA17: JP123.3 R36.1 U18.7
SDA18: JP130.3 R38.1 U19.7
SDA19: JP137.3 R40.1 U20.7
SDA20: JP144.3 R42.1 U21.7
SDA21: JP151.3 R44.1 U22.7
SDA22: JP158.3 R46.1 U23.7
SDA23: JP165.3 R48.1 U24.7
SDA24: JP172.3 R50.1 U25.7
SDA25: JP179.3 R52.1 U26.7
SDA26: JP186.3 R54.1 U27.7
SDA27: JP193.3 R56.1 U28.7
SDA28: JP200.3 R58.1 U29.7
SDA29: JP207.3 R60.1 U30.7
SDA30: JP214.3 R62.1 U31.7
SDA31: JP221.3 R64.1 U32.7
SDA32: JP228.3 R66.1 U33.7
SDA33: JP235.3 R68.1 U34.7
SDA34: JP242.3 R70.1 U35.7
SDA35: JP249.3 R72.1 U36.7
SDA36: JP256.3 R74.1 U37.7
SDA37: JP263.3 R76.1 U38.7
SDA38: JP270.3 R78.1 U39.7
SDA39: JP277.3 R80.1 U40.7
VCC: C1.1 C2.A C4.1 JP4.5 R1.2 R2.2 U1.1 U1.4
VCC1: C5.1 C6.A C8.1 JP11.5 R3.2 R4.2 U2.1 U2.4
VCC2: C9.1 C10.A C12.1 JP18.5 R5.2 R6.2 U3.1 U3.4
VCC3: C13.1 C14.A C16.1 JP25.5 R7.2 R8.2 U4.1 U4.4
VCC4: C17.1 C18.A C20.1 JP32.5 R9.2 R10.2 U5.1 U5.4
VCC5: C21.1 C22.A C24.1 JP39.5 R11.2 R12.2 U6.1 U6.4
VCC6: C25.1 C26.A C28.1 JP46.5 R13.2 R14.2 U7.1 U7.4
VCC7: C29.1 C30.A C32.1 JP53.5 R15.2 R16.2 U8.1 U8.4
VCC8: C33.1 C34.A C36.1 JP60.5 R17.2 R18.2 U9.1 U9.4
VCC9: C37.1 C38.A C40.1 JP67.5 R19.2 R20.2 U10.1 U10.4
VCC10: C41.1 C42.A C44.1 JP74.5 R21.2 R22.2 U11.1 U11.4
VCC11: C45.1 C46.A C48.1 JP81.5 R23.2 R24.2 U12.1 U12.4
VCC12: C49.1 C50.A C52.1 JP88.5 R25.2 R26.2 U13.1 U13.4
VCC13: C53.1 C54.A C56.1 JP95.5 R27.2 R28.2 U14.1 U14.4
VCC14: C57.1 C58.A C60.1 JP102.5 R29.2 R30.2 U15.1 U15.4
VCC15: C61.1 C62.A C64.1 JP109.5 R31.2 R32.2 U16.1 U16.4
VCC16: C65.1 C66.A C68.1 JP116.5 R33.2 R34.2 U17.1 U17.4
VCC17: C69.1 C70.A C72.1 JP123.5 R35.2 R36.2 U18.1 U18.4
VCC18: C73.1 C74.A C76.1 JP130.5 R37.2 R38.2 U19.1 U19.4
VCC19: C77.1 C78.A C80.1 JP137.5 R39.2 R40.2 U20.1 U20.4
VCC20: C81.1 C82.A C84.1 JP144.5 R41.2 R42.2 U21.1 U21.4
VCC21: C85.1 C86.A C88.1 JP151.5 R43.2 R44.2 U22.1 U22.4
VCC22: C89.1 C90.A C92.1 JP158.5 R45.2 R46.2 U23.1 U23.4
VCC23: C93.1 C94.A C96.1 JP165.5 R47.2 R48.2 U24.1 U24.4
VCC24: C97.1 C98.A C100.1 JP172.5 R49.2 R50.2 U25.1 U25.4
VCC25: C101.1 C102.A C104.1 JP179.5 R51.2 R52.2 U26.1 U26.4
VCC26: C105.1 C106.A C108.1 JP186.5 R53.2 R54.2 U27.1 U27.4
VCC27: C109.1 C110.A C112.1 JP193.5 R55.2 R56.2 U28.1 U28.4
VCC28: C113.1 C114.A C116.1 JP200.5 R57.2 R58.2 U29.1 U29.4
VCC29: C117.1 C118.A C120.1 JP207.5 R59.2 R60.2 U30.1 U30.4
VCC30: C121.1 C122.A C124.1 JP214.5 R61.2 R62.2 U31.1 U31.4
VCC31: C125.1 C126.A C128.1 JP221.5 R63.2 R64.2 U32.1 U32.4
VCC32: C129.1 C130.A C132.1 JP228.5 R65.2 R66.2 U33.1 U33.4
VCC33: C133.1 C134.A C136.1 JP235.5 R67.2 R68.2 U34.1 U34.4
VCC34: C137.1 C138.A C140.1 JP242.5 R69.2 R70.2 U35.1 U35.4
VCC35: C141.1 C142.A C144.1 JP249.5 R71.2 R72.2 U36.1 U36.4
VCC36: C145.1 C146.A C148.1 JP256.5 R73.2 R74.2 U37.1 U37.4
VCC37: C149.1 C150.A C152.1 JP263.5 R75.2 R76.2 U38.1 U38.4
VCC38: C153.1 C154.A C156.1 JP270.5 R77.2 R78.2 U39.1 U39.4
VCC39: C157.1 C158.A C160.1 JP277.5 R79.2 R80.2 U40.1 U40.4